# EAGLE board AugmentedStethoscope_v1 (EAGLE 8.6.3)
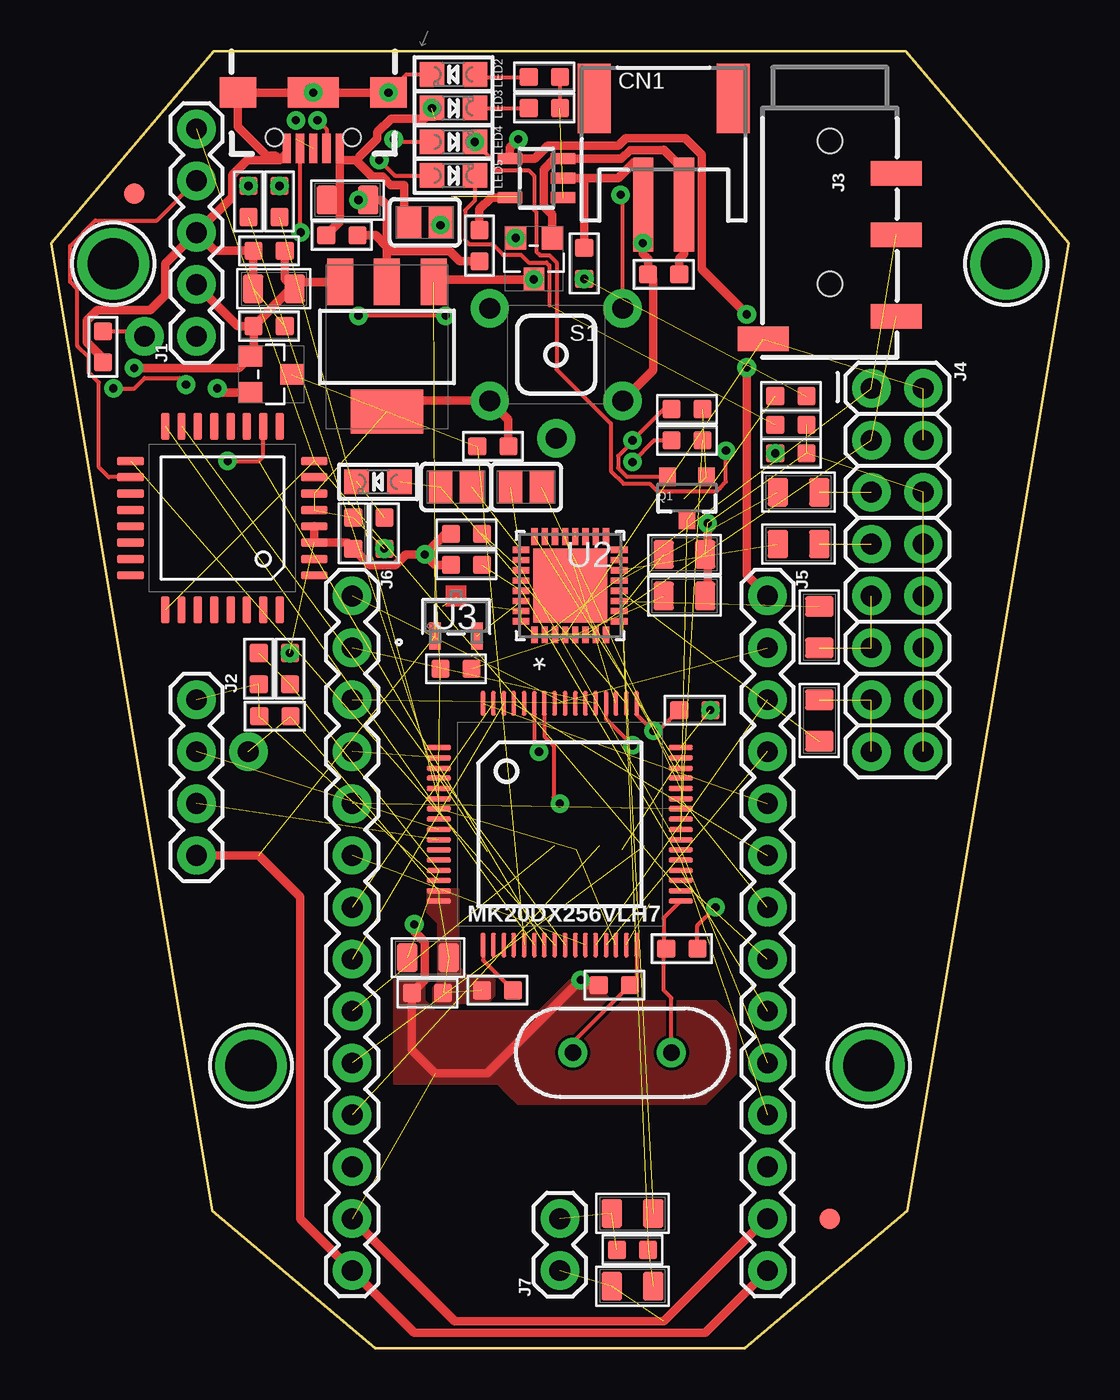
[diagram p0: board, top side]
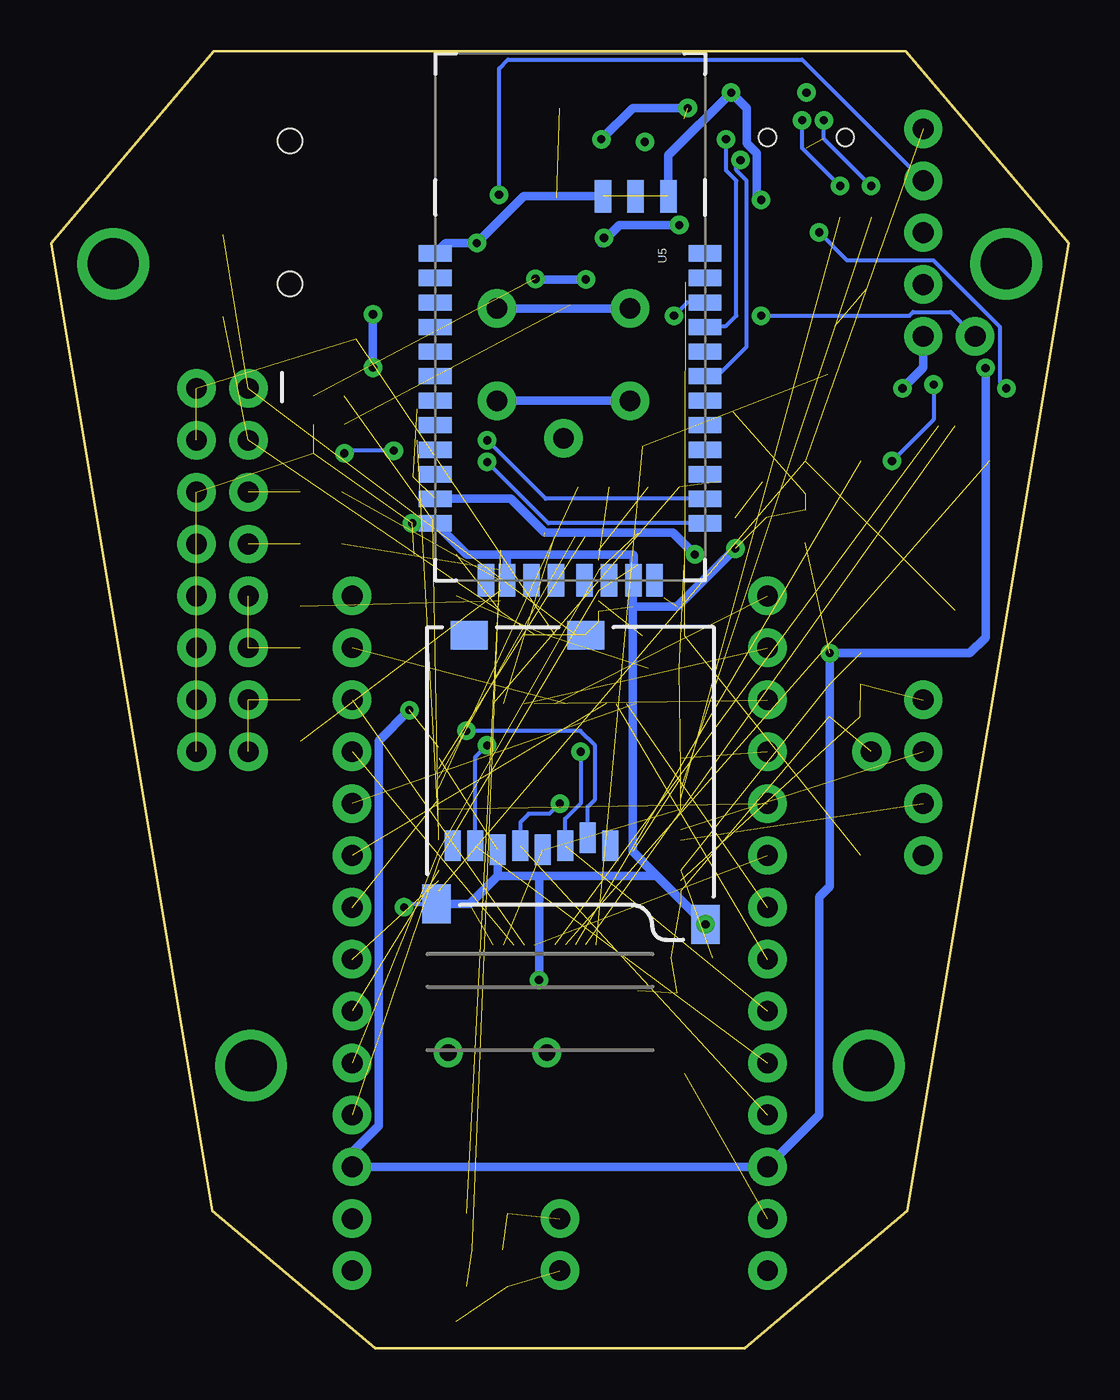
[diagram p1: board, bottom side, seen from below]

Size 49.78 x 63.5 mm. Coordinates in mm from the lower left corner, seen from the top.
Outline: 0,54.11 7.89,6.74 15.85,0 33.93,0 41.89,6.74 49.78,54.11 41.83,63.5 7.96,63.5 0,54.11
Copper layers (1*16): Top 0.035mm / dielectric 1.5mm / Bottom 0.035mm
Design rules "SparkFun *": minimum track width 8mil, minimum drill 20mil, track to track 6mil, track to pad 6mil, pad to pad 6mil, via to via 6mil, smd to smd 6mil, copper to edge 10mil, drill to drill 8mil, minimum pad ring 12mil, minimum via ring 10mil, stop-mask expansion 4mil, vias tented up to drill 25mil, thermal gap 10mil

## Footprints (pad centres in the part's own frame; a part is rotated, then mirrored left to right if it is on the bottom)
C0805 = smd 1.397 x 1.016: 1 0,1.016; 2 0,-1.016
C0603 = smd 0.889 x 0.889: 1 0,0.762; 2 0,-0.762
JSTPH2 = smd 1 x 4.6: 1 -1,-3.7; 2 1,-3.7 | smd 1.6 x 3.4: NC1 -3.4,1.5; NC2 3.4,1.5
FIDUCIAL_1MM = smd 1 x 1: 1 0,0
HC49US = drill 0.813: 1 -2.413,0; 2 2.413,0
1X05 = drill 1.016 pad 1.88: 1 0,0; 2 2.54,0; 3 5.08,0; 4 7.62,0; 5 10.16,0
1X04 = drill 1.016 pad 1.88: 1 0,0; 2 2.54,0; 3 5.08,0; 4 7.62,0
AUDIO_JACK_3.5MM_TRRS_SMD_RA = smd 1.2 x 2.5: EARTH 11.3,-3.25; RING1 6.2,3.25; RING2 3.2,3.25; TIP 10.2,3.25 | hole 1.2: 1.6,0; 8.6,0
2X8 = drill 1.016 pad 1.88: 1 0,0; 2 0,2.54; 3 2.54,0; 4 2.54,2.54; 5 5.08,0; 6 5.08,2.54; 7 7.62,0; 8 7.62,2.54; 9 10.16,0; 10 10.16,2.54; 11 12.7,0; 12 12.7,2.54; 13 15.24,0; 14 15.24,2.54; 15 17.78,0; 16 17.78,2.54
1X14 = drill 1.016 pad 1.88: 1 0,0; 2 2.54,0; 3 5.08,0; 4 7.62,0; 5 10.16,0; 6 12.7,0; 7 15.24,0; 8 17.78,0; 9 20.32,0; 10 22.86,0; 11 25.4,0; 12 27.94,0; 13 30.48,0; 14 33.02,0
1X02 = drill 1.016 pad 1.88: 1 0,0; 2 2.54,0
USB-B-MICRO-SMD = smd 1.45 x 0.4: D+ 2.725,0; D- 2.725,0.65; GND 2.725,-1.3; ID 2.725,-0.65; VBUS 2.725,1.3 | smd 1.5 x 1.8: SHIELD1 0,3.685; SHIELD2 0,-3.685 | smd 1.5 x 2.5: SHIELD3 0,0 | hole 0.85: 2.2,1.9; 2.2,-1.9
1X01NS = drill 1.016 pad 1.88: 1 0,0
LQFP32-08 = smd 1.3 x 0.4: 1 -4.493,2.8; 2 -4.493,2; 3 -4.493,1.2; 4 -4.493,0.4; 5 -4.493,-0.4; 6 -4.493,-1.2; 7 -4.493,-2; 8 -4.493,-2.8; 17 4.493,-2.8; 18 4.493,-2; 19 4.493,-1.2; 20 4.493,-0.4; 21 4.493,0.4; 22 4.493,1.2; 23 4.493,2; 24 4.493,2.8 | smd 0.4 x 1.3: 9 -2.8,-4.493; 10 -2,-4.493; 11 -1.2,-4.493; 12 -0.4,-4.493; 13 0.4,-4.493; 14 1.2,-4.493; 15 2,-4.493; 16 2.8,-4.493; 25 2.8,4.493; 26 2,4.493; 27 1.2,4.493; 28 0.4,4.493; 29 -0.4,4.493; 30 -1.2,4.493; 31 -2,4.493; 32 -2.8,4.493
LQFP64-05 = smd 1.2 x 0.25: 1 -5.915,3.759; 2 -5.915,3.251; 3 -5.915,2.743; 4 -5.915,2.261; 5 -5.915,1.753; 6 -5.915,1.245; 7 -5.915,0.762; 8 -5.915,0.254; 9 -5.915,-0.254; 10 -5.915,-0.762; 11 -5.915,-1.245; 12 -5.915,-1.753; 13 -5.915,-2.261; 14 -5.915,-2.743; 15 -5.915,-3.251; 16 -5.915,-3.759; 33 5.915,-3.759; 34 5.915,-3.251; 35 5.915,-2.743; 36 5.915,-2.261; 37 5.915,-1.753; 38 5.915,-1.245; 39 5.915,-0.762; 40 5.915,-0.254; 41 5.915,0.254; 42 5.915,0.762; 43 5.915,1.245; 44 5.915,1.753; 45 5.915,2.261; 46 5.915,2.743; 47 5.915,3.251; 48 5.915,3.759 | smd 0.25 x 1.2: 17 -3.759,-5.915; 18 -3.251,-5.915; 19 -2.743,-5.915; 20 -2.261,-5.915; 21 -1.753,-5.915; 22 -1.245,-5.915; 23 -0.762,-5.915; 24 -0.254,-5.915; 25 0.254,-5.915; 26 0.762,-5.915; 27 1.245,-5.915; 28 1.753,-5.915; 29 2.261,-5.915; 30 2.743,-5.915; 31 3.251,-5.915; 32 3.759,-5.915; 49 3.759,5.915; 50 3.251,5.915; 51 2.743,5.915; 52 2.261,5.915; 53 1.753,5.915; 54 1.245,5.915; 55 0.762,5.915; 56 0.254,5.915; 57 -0.254,5.915; 58 -0.762,5.915; 59 -1.245,5.915; 60 -1.753,5.915; 61 -2.261,5.915; 62 -2.743,5.915; 63 -3.251,5.915; 64 -3.759,5.915
CHIPLED_0805 = smd 1.2 x 1.2: A 0,-1.05; C 0,1.05
SOT23-3 = smd 0.8 x 0.9: 1 -0.95,-1; 2 0.95,-1; 3 0,1.1
R0603 = smd 0.889 x 0.889: 1 0,0.762; 2 0,-0.762
SOT-23 = smd 1.016 x 1.143: 1 -0.889,-1.016; 2 0.889,-1.016; 3 0,1.016
L0603 = smd 0.889 x 0.889: 1 -0.762,0; 2 0.762,0
ALPS_SKHH = drill 1.016 pad 1.88: 1 -3.251,2.261; 2 3.251,2.261; 3 -3.251,-2.261; 4 3.251,-2.261; 5 0,-4.1
SOLDERJUMPER = smd 1.168 x 1.6: 1 -0.762,0; 2 0.762,0
SOT-223 = smd 1.27 x 2.286: 1 -2.286,-3.175; 2 0,-3.175; 3 2.286,-3.175 | smd 3.556 x 2.159: PAD 0,3.175
MICRO-SD-SOCKET-PP = smd 0.8 x 1.5: 1 -8.94,10.7; 2 -7.84,10.3; 3 -6.74,10.7; 4 -5.64,10.9; 5 -4.54,10.7; 6 -3.44,10.9; 7 -2.34,10.7; 8 -1.24,10.7 | smd 1.8 x 1.4: CD1 -7.75,0.4; CD2 -2.05,0.4 | smd 1.4 x 1.9: GND1 -13.6,14.55; GND2 -0.45,13.55
QFN32 = smd 0.305 x 0.813: 1 1.75,2.4; 2 1.25,2.4; 3 0.75,2.4; 4 0.25,2.4; 5 -0.25,2.4; 6 -0.75,2.4; 7 -1.25,2.4; 8 -1.75,2.4; 17 -1.75,-2.4; 18 -1.25,-2.4; 19 -0.75,-2.4; 20 -0.25,-2.4; 21 0.25,-2.4; 22 0.75,-2.4; 23 1.25,-2.4; 24 1.75,-2.4 | smd 0.813 x 0.305: 9 -2.4,1.75; 10 -2.4,1.25; 11 -2.4,0.75; 12 -2.4,0.25; 13 -2.4,-0.25; 14 -2.4,-0.75; 15 -2.4,-1.25; 16 -2.4,-1.75; 25 2.4,-1.75; 26 2.4,-1.25; 27 2.4,-0.75; 28 2.4,-0.25; 29 2.4,0.25; 30 2.4,0.75; 31 2.4,1.25; 32 2.4,1.75 | smd 3.607 x 3.607: HTAB 0,0
SOT-23' = smd 0.561 x 1.321: 1 -1.025,-0.945; 2 1.025,-0.945 | smd 0 x 0 bottom: 3 0,0.945
SOT23-5 = smd 0.55 x 1.2: 1 -0.95,-1.3; 2 0,-1.3; 3 0.95,-1.3; 4 0.95,1.3; 5 -0.95,1.3
RN41 = smd 0.8 x 1.6: 1 -6.6,-6.6; 2 -5.4,-6.6; 3 -4.2,-6.6; 4 -3,-6.6; 5 -1.8,-6.6; 6 -0.6,-6.6; 7 0.6,-6.6; 8 1.8,-6.6; 9 3,-6.6; 10 4.2,-6.6; 11 5.4,-6.6; 12 6.6,-6.6; 13 6.6,6.6; 14 5.4,6.6; 15 4.2,6.6; 16 3,6.6; 17 1.8,6.6; 18 0.6,6.6; 19 -0.6,6.6; 20 -1.8,6.6; 21 -3,6.6; 22 -4.2,6.6; 23 -5.4,6.6; 24 -6.6,6.6 | smd 1.6 x 0.8: 25 -9.4,4.8; 26 -9.4,3.2; 27 -9.4,1.6; 28 9.4,3.1; 29 9.4,-3.1; 30 9.4,-4.122; 31 9.4,-1.9; 32 9.4,-0.7; 33 9.4,0.7; 34 9.4,1.9; 35 9.4,4.122
MOUNTINGHOLE_2.5_PLATED = drill 2.5 pad 3.2: P$1 0,0

## Placement (x,y rotation side)
C1  2.2uF  [C0805]  14.5,56.21 90 top
C2  0.1uF  [C0603]  14.78,39.9 180 top
C3  0.1uF  [C0603]  21.62,44.15 90 top
C4  0.1uF  [C0603]  26.09,53.11 180 top
C5  2.2uF  [C0805]  18.44,19.13 90 top
C6  2.2uF  [C0805]  37.59,35.31 0 top
C7  2.2uF  [C0805]  37.59,30.73 180 top
C8  22pF  [C0603]  27.56,17.78 270 top
C9  2.2uF  [C0805]  36.58,41.91 90 top
C10  2.2uF  [C0805]  36.58,39.37 90 top
C11  22pF  [C0603]  30.86,19.56 90 top
C12  0.1uF  [C0603]  10.67,53.72 270 top
C13  0.1uF  [C0603]  10.95,30.94 90 top
C14  0.15uF  [C0805]  30.99,38.86 90 top
C15  2.2uF  [C0805]  10.9,51.87 270 top
C16  0.1uF  [C0603]  10.67,50.04 90 top
C17  0.1uF  [C0603]  21.84,17.53 270 top
C18  0.1uF  [C0805]  28.45,6.6 270 top
C19  2.2uF  [C0805]  30.99,36.83 90 top
C20  2.2uF  [C0805]  28.45,3.05 270 top
C21  10uF  [C0603]  14.22,54.48 90 top
C22  10uF  [C0603]  29.97,52.58 270 top
CN1  JSTPH  [JSTPH2]  29.97,59.69 0 top
FID2  FIDUCIAL""  [FIDUCIAL_1MM]  4.06,56.52 0 top
FID3  FIDUCIAL""  [FIDUCIAL_1MM]  38.1,6.35 0 top
G1  16MHz  [HC49US]  27.94,14.48 0 top
J1  [1X05]  7.11,49.53 90 top
J2  [1X04]  7.11,31.75 270 top
J3  AUDIO_JACK_TRRSSMD_RA  [AUDIO_JACK_3.5MM_TRRS_SMD_RA]  38.1,60.71 270 top
J4  [2X8]  40.13,46.99 270 top
J5  [1X14]  35.05,36.83 270 top
J6  [1X14]  14.73,36.83 270 top
J7  [1X02]  24.89,3.81 90 top
J8  [USB-B-MICRO-SMD]  12.83,61.47 270 top
JP1  M01SMDNS  [1X01NS]  4.57,49.53 90 top
JP2  M01SMDNS  [1X01NS]  9.65,29.21 270 top
K1  MKL04Z32VLC4  [LQFP32-08]  8.38,40.64 180 top
K2  MK20DX256VLH7  [LQFP64-05]  24.89,25.65 0 top
LED1  BLUE  [CHIPLED_0805]  16,42.42 90 top
LED2  GREEN  [CHIPLED_0805]  19.69,62.36 90 top
LED3  RED  [CHIPLED_0805]  19.69,60.71 270 top
LED4  RED  [CHIPLED_0805]  19.69,59.05 270 top
LED5  GREEN  [CHIPLED_0805]  19.69,57.4 270 top
Q1  MOSFET-NCHANNELSMD  [SOT23-3]  31.12,41.66 180 top
R1  10K  [R0603]  31.5,31.24 90 top
R2  [SOT-23]  10.77,47.68 270 top
R3  [L0603]  18.42,17.4 0 top
R4  [L0603]  11.68,33.27 90 top
R5  470  [R0603]  10.16,33.27 0 top
R6  33  [R0603]  11.18,56.13 0 top
R7  33  [R0603]  9.65,56.13 0 top
R8  [L0603]  19.81,33.27 180 top
R9  2.2K  [R0603]  28.45,4.83 90 top
R10  470  [R0603]  16.31,39.9 180 top
R11  10K  [R0603]  20.32,38.35 270 top
R12  10K  [R0603]  20.32,39.88 270 top
R13  10K  [R0603]  36.2,46.61 270 top
R14  470  [R0603]  24.13,60.71 90 top
R15  470  [R0603]  24.13,62.23 90 top
R16  10K  [R0603]  31.12,44.45 270 top
R17  10K  [R0603]  31.12,45.97 270 top
R18  330  [R0603]  36.2,43.81 270 top
R19  2K  [R0603]  20.96,53.98 180 top
R20  10K  [R0603]  2.54,49.02 180 top
R21  [SOT-23]  23.62,53.34 180 top
R22  330  [R0603]  36.2,45.21 270 top
S1  [ALPS_SKHH]  24.71,48.64 0 top
SJ1  [SOLDERJUMPER]  23.24,42.16 0 top
SJ2  [SOLDERJUMPER]  19.81,42.16 180 top
SJ3  [SOLDERJUMPER]  18.29,55.12 0 top
T1  MCP1825S  [SOT-223]  16.43,49.02 180 top
U1  microSD  [MICRO-SD-SOCKET-PP]  31.37,35.31 180 bottom
U2  SGTL5000XNAA3R2  [QFN32]  25.4,37.34 180 top
U3  AP7313-18SAG-7  [SOT-23']  19.81,35.81 0 top
U4  MCP73831T-2ACI/OT  [SOT23-5]  23.75,57.28 90 top
U5  BLUETOOTH-RN41  [RN41]  24.38,46.99 270 bottom
U$1  MOUNTINGHOLE2.5  [MOUNTINGHOLE_2.5_PLATED]  46.74,53.09 0 top
U$15  MOUNTINGHOLE2.5  [MOUNTINGHOLE_2.5_PLATED]  3.05,53.09 180 top
U$17  MOUNTINGHOLE2.5  [MOUNTINGHOLE_2.5_PLATED]  40.01,13.84 0 top
U$18  MOUNTINGHOLE2.5  [MOUNTINGHOLE_2.5_PLATED]  9.78,13.84 0 top

## Library data of the parts
C1 C5-C7 C9 C10 C14 C15 C18-C20 = t32_ref; DESC: 2.2uF / 25 VDC / X7R; MF: Taiyo Yuden; MPN: TMK212B7225KG-TR; OC_MOUSER: 963-TMK212B7225KG-TR; PACKAGE: 0805; TYPE: Capacitor
C2-C4 C12 C13 C16 C17 C21 C22 = t32_ref; DESC: 0.1uF / 16VDC / X7R; MF: Murata Electronics; MPN: GRM188R71C104KA01D; OC_MOUSER: 81-GRM39X104K16; PACKAGE: 0603; TYPE: Capacitor
C8 C11 = t32_ref; DESC: 22pF / 50VDC / C0G (NP0); MF: Vishay / Vitramon; MPN: VJ0603A220JXACW1BC; OC_MOUSER: 77-VJ0603A220JXACBC; PACKAGE: 0603; TYPE: Capacitor
CN1 LED1-LED5 U4 = microbuilder
FID2 FID3 U$1 U$15 U$17 U$18 = microbuilder; BOM: EXCLUDE
G1 = t32_ref; DESC: 16MHz / 18pF / 10ppm; MF: ABRACON; MPN: ABL-16.000MHz-B1U; OC_MOUSER: 815-ABL-16-B1U; PACKAGE: HC-49US; TYPE: Crystal
J1 J4-J7 = SparkFun-Connectors
J2 = SparkFun-Connectors; PROD_ID: CONN-09696
J3 = SparkFun-Connectors; PROD_ID: CONN-10676; SF_ID: PRT-12639
J8 = SparkFun-Connectors; PROD_ID: CONN-11752
JP1 JP2 Q1 U1 = SparkFun
K1 = t32_ref; DESC: MKL04Z32VLC4 (preprogrammed); MF: PJRC; MPN: IC_MKL04Z32_TQFP32; PACKAGE: LQFP-32; TYPE: Microcontroller
K2 = t32_ref; DESC: MK20DX256VLH7; MF: NXP; MPN: MK20DX256VLH7; OC_MOUSER: 841-MK20DX256VLH7; PACKAGE: LQFP-64; TYPE: Microcontroller
R1 R5 R9-R13 R17-R20 R22 = t32_ref; DESC: 470R / 1 % / 0.1 W; MF: Vishay; MPN: CRCW0603470RFKEA; OC_MOUSER: 71-CRCW0603-470-E3; PACKAGE: 0603; TYPE: Resistor
R2 R21 = t32_ref; DESC: Dual Schottky, common cat; MF: NXP Semiconductors; MPN: BAT54C,215; OC_MOUSER: 771-BAT54C-T/R; PACKAGE: SOT-23; TYPE: Diode
R3 R4 R8 = t32_ref; DESC: 600R / 100MHz; MF: Murata Electronics; MPN: BLM18AG601SN1D; OC_MOUSER: 81-BLM11A601S; PACKAGE: 0603; TYPE: Ferrite
R6 R7 R14-R16 = t32_ref; DESC: 33R / 1% / 0.25 W; MF: Panasonic; MPN: ERJ-PA3F33R0V; OC_MOUSER: 667-ERJ-PA3F33R0V; PACKAGE: 0603; TYPE: Resistor
S1 = t32_ref; DESC: SPST; MF: ALPS; MPN: SKHHPKA010; OC_MOUSER: 688-SKHHPK; PACKAGE: 6x6x5 MM; TYPE: Tactile switch
SJ1-SJ3 = t32_ref
T1 = t32_ref; DESC: 3.3V 500mA; MF: Microchip Technology; MPN: MCP1825S-3302E/DB; OC_MOUSER: 579-MCP1825S-3302EDB; PACKAGE: SOT-223-3; TYPE: Voltage regulator
U2 = pd3d_augmentedstethoscope; MANUFACTURER_PART_NUMBER: SGTL5000XNAA3R2; VENDOR: Freescale
U3 = pd3d_augmentedstethoscope; MANUFACTURER_PART_NUMBER: AP731318SAG7; VENDOR: Diodes Inc
U5 = ScratchPad

## Nets
0/RX1: K2.39 Q1.3 R13.2
1/TX1: K2.40 R16.1
2: J5.2 K2.57
3.3V: C2.1 C12.1 C15.1 C16.1 J1.2 J5.12 J6.12 K1.3 K1.4 K2.3 K2.7 K2.30 K2.48 Q1.1 R1.2 R2.1 R4.2 R8.2 R11.2 R12.2 R17.1 T1.3 U1.4 U2.20 U5.11
3/PWM: J5.3 K2.28
4/PWM: J5.4 K2.29
5/PWM: J5.5 K2.64
6/PWM: J5.6 K2.61
7/SPI_MOSI: J6.9 K2.59 U1.3
8: K2.60
9: K2.46 U2.24
10/SPI_CS: K2.49 R1.1 U1.2
11: K2.51 U2.21
12/SPI_MISO: J6.10 K2.52 U1.7
13/LED: K2.50 LED1.A SJ2.2
14/SPI_SCK: J6.11 K2.58 U1.5
15/A1: J5.7 K2.43
16/A2: J5.8 K2.35
17/A3: J5.9 K2.36
18/A4/SDA: J5.10 K2.38 R12.1 U2.27
19/A5/SCL: J5.11 K2.37 R11.1 U2.29
20/A6/SPI_CS: J6.8 K2.62
21/A7/SPI_CS: J6.7 K2.63
22/A8: K2.44 SJ1.2
23/A9: K2.45 U2.23
24: J6.6 K2.27
25/PWM: J6.5 K2.42
26/A15: J6.4 K2.2
27/A16: J6.3 K2.54
28/A17: J6.2 K2.53
29/A18: K2.55
30/A19: J6.1 K2.56
31/A20: K2.1
32/TOUCH: K2.41
33/TOUCH: K2.26
A10: J2.2 K2.9
A11: J2.3 K2.10
A12: K2.11
A13: K2.12
AGND: C5.2 C13.2 C17.2 JP2.1 K2.15 K2.16 R3.2
AREF: C13.1 J2.1 K2.14 R5.2
D3: LED4.C R18.2
D4: LED5.C R22.2
D+: J8.D+ R7.1
D-: J8.D- R6.1
DAC/A14: K2.18
DETECT: U1.CD2
GND: C1.2 C2.2 C3.2 C4.2 C8.2 C11.2 C12.2 C14.2 C15.2 C16.2 C19.2 C20.2 C21.2 C22.2 CN1.1 J1.3 J4.6 J4.8 J4.10 J4.12 J4.14 J4.16 J5.13 J6.13 J7.1 J8.GND J8.SHIELD1 J8.SHIELD2 J8.SHIELD3 K1.5 K1.6 K2.4 K2.31 K2.47 LED2.C R3.1 R10.1 R18.1 R19.1 R20.1 R22.1 S1.3 S1.4 T1.2 T1.PAD U1.6 U1.GND1 U1.GND2 U2.1 U2.3 U2.7 U2.31 U2.32 U3.3 U4.2 U5.1 U5.12 U5.25 U5.27 U5.28 U5.29
HPGND: J3.EARTH J4.2 J4.4 U2.4
HPL: J3.TIP J4.3 U2.6
HPR: J3.RING1 J4.1 U2.2
ID: J8.ID K1.10 K2.23
LIL: C10.2 J4.7
LIL_ISO: C10.1 U2.14
LIR: C9.2 J4.5
LIR_ISO: C9.1 U2.13
LOL: C7.2 J4.13 J4.15
LOL_ISO: C7.1 U2.12
LOR: C6.2 J4.9 J4.11
LOR_ISO: C6.1 U2.11
MIC: C18.2 J7.2 R9.1
MIC_BIAS: C20.1 R9.2 U2.16
N$1: C22.1 CN1.2 R21.1 U4.3
N$2: K1.16 K2.22
N$3: K1.17 K2.24
N$4: C14.1 U2.10
N$5: C8.1 G1.1 K2.32
N$6: C11.1 G1.2 K2.33
N$9: SJ1.1 U2.26
N$10: K2.5 R7.2
N$11: C17.1 K2.17
N$12: U2.30 U3.2
N$13: SJ2.1 U2.25
N$14: K2.6 R6.2
N$15: C5.1 K2.13 R4.1 R5.1
N$18: R21.2 SJ3.2
N$52: LED1.C R10.2
N$68: C3.1 K2.21 R2.3
N$70: K1.15 K2.25
N$71: LED3.C R14.1
N$72: R14.2 R15.2 U4.1
N$73: LED4.A U5.21
N$74: LED5.A U5.19
N$75: R19.2 U4.5
N$76: LED2.A R15.1
N$79: C19.1 R8.1 U2.5
N$80: C18.1 U2.15
PIO4: JP1.1 R20.2 U5.22
PROG: J1.4 K1.18 S1.1 S1.2
RESET: J1.5 K1.8 K1.25 K2.34
SMIRF_CTS: U5.16
SMIRF_RTS: U5.15
SMIRF_RX: R16.2 U5.13
SMIRF_TX: Q1.2 R17.2 U5.14
V_USB: C1.1 C21.1 J5.1 J8.VBUS LED3.A SJ3.1 U4.4
VIN: C4.1 J2.4 J5.14 J6.14 R13.1 R21.3 T1.1 U3.1
VRTC: J1.1 R2.2

## Tracks (layer width: path | path; a pad name or v marks a point on that pad's centre or on a via)
0/RX1  (2 unrouted)
1/TX1  (1 unrouted)
2  (1 unrouted)
3.3V  (via drill 0.4)  (10 unrouted)
  Top 0.406: J1.2 9.14,50.04 C16.1 | C15.1 12.24,52.2 T1.3 | C15.1 11.43,52.35 C12.1 | C16.1 9.91,48.72 R2.1 9.17,47.98 v4.06,47.98 | C16.1 11.74,51.87 C15.1 | v18.29,38.86 19.3,39.88 R12.2 | v18.29,38.86 18.8,38.35 R11.2 | K1.4 K1.3 14.48,39.44 C2.1 15.58,38.34 16.83,38.34 17.35,38.86 v18.29,38.86
  Bottom 0.406: v4.06,47.98 4.06,34.8 4.83,34.04 R4.2 11.68,22.61 12.19,22.1 12.19,11.43 J6.12 J5.12 35.05,9.6 33.76,10.89 33.76,29.74 R1.2 | U5.11 27.3,41.59 25.64,39.93 19.36,39.93 v18.29,38.86
  other vias: 11.68,34.04 32.26,31.24
3/PWM  (1 unrouted)
4/PWM  (1 unrouted)
5/PWM  (1 unrouted)
6/PWM  (1 unrouted)
7/SPI_MOSI  (via drill 0.4)  (1 unrouted)
  Top 0.203: K2.59 23.65,29.44 v23.88,29.21
  Bottom 0.203: U1.3 24.63,25.92 23.88,26.67 v23.88,29.21
9  (1 unrouted)
10/SPI_CS  (via drill 0.4)
  Top 0.203: R1.1 29.72,30.23 v29.46,30.23 28.65,31.04 K2.49
  Bottom 0.203: U1.2 23.53,26.51 23.17,26.88 23.17,29.5 23.89,30.23 v29.46,30.23
11  (1 unrouted)
12/SPI_MISO  (via drill 0.4)  (1 unrouted)
  Top 0.203: v28.45,29.52 27.15,30.81 K2.52
  Bottom 0.203: U1.7 29.03,28.94 v28.45,29.52
13/LED  (2 unrouted)
14/SPI_SCK  (via drill 0.4)  (1 unrouted)
  Top 0.203: K2.58 24.13,29.96 24.58,29.5 24.58,26.98 v24.89,26.67
  Bottom 0.203: v24.89,26.67 25.4,26.16 26.42,26.16 26.83,25.75 U1.5
15/A1  (1 unrouted)
16/A2  (1 unrouted)
17/A3  (1 unrouted)
18/A4/SDA  (3 unrouted)
19/A5/SCL  (3 unrouted)
20/A6/SPI_CS  (1 unrouted)
21/A7/SPI_CS  (1 unrouted)
22/A8  (1 unrouted)
23/A9  (1 unrouted)
24  (1 unrouted)
25/PWM  (1 unrouted)
26/A15  (1 unrouted)
27/A16  (1 unrouted)
28/A17  (1 unrouted)
30/A19  (1 unrouted)
A10  (1 unrouted)
A11  (1 unrouted)
AGND  (6 unrouted)
  pour Top (no thermals): 18.42,22.48 18.42,21.34 18.92,20.83 18.92,17.91 18.67,17.65 18.67,17.02 18.8,16.89 21.34,16.89 21.72,17.27 21.72,18.03 21.59,18.16 21.46,18.29 20.32,18.29 19.94,18.67 19.94,22.48
AREF  (3 unrouted)
D3  (via drill 0.4)
  Top 0.203: LED4.C 21.6,58.2 21.6,57.85 21.78,57.66 23.37,57.66 23.64,57.39 23.64,55.72 23.75,55.6 23.75,53.68 23.92,53.5 24.38,53.5 24.74,53.15 24.74,47.92 27.38,45.27 27.38,42.95 28.01,42.33 29.29,42.33 29.66,41.95 32.57,41.95 32.72,42.1 32.72,42.12 33.02,42.42 v33.02,43.94
  Bottom 0.203: v33.02,43.94 35.31,43.94 R18.2
  other vias: 20.74,59.05 35.43,43.81
D4  (1 unrouted)
  Top 0.203: LED5.C 20.74,56.18 20.26,55.7 20.26,54.25 20.47,54.04 21.61,54.04 22.12,53.53 22.99,53.53 23.37,53.15 24.24,53.15 24.38,53 24.38,51.05
D+  (via drill 0.4)  (1 unrouted)
  Top 0.203: R7.1 v9.66,56.9
  Bottom 0.203: v9.66,56.9 11.98,59.21 v11.98,60.11
D-  (via drill 0.4)
  Top 0.203: v13.04,60.11 13.48,59.67 J8.D-
  Bottom 0.203: R6.1 13.04,58.75 v13.04,60.11
  other vias: 11.18,56.9
GND  (via drill 0.4)  (28 unrouted)
  Top 0.203: C11.2 31.62,20.7 v32.51,21.59 | J8.SHIELD1 17.4,62.36 LED2.C
  Top 0.406: U4.2 25.91,57.28 | 25.91,57.28 27.75,57.28 28.56,58.09 28.96,58.09 28.96,56.01 CN1.1 28.96,55.97 v28.96,54.1 28.96,53.59 29.21,53.34 C22.2 29.46,52.32 29.46,47.88 S1.4 | C4.2 26.09,57.1 25.91,57.28 | J1.3 8,53.72 C12.2 9.88,53.7 C15.2 | J6.13 19.76,1.32 29.97,1.32 35,6.35 J5.13 | U1.GND1 17.77,20.42 18.29,19.9 18.29,18.03 R3.1 17.65,14.61 18.8,13.46 21.34,13.46 v25.91,18.03 26.16,17.78 C8.2 | v32.12,40.39 32.12,36.95 C19.2 | R10.1 v16.31,39.15 | R20.1 2.54,48.46 1.74,49.26 1.74,50.31 2.26,50.83 4.85,50.83 5.59,51.56 5.59,53.09 J1.3 | 16.43,53.92 15.88,54.48 C21.2 | T1.2 16.43,53.92 | 16.43,53.92 16.43,55.96 16.18,56.21 C1.2 v15.04,56.21 | J8.SHIELD1 J8.SHIELD3 J8.SHIELD2 9.14,59.8 10.56,58.39 10.96,58.39 11.18,58.17 | 11.18,58.17 11.53,58.52 J8.GND | J1.3 8.85,56.35 8.85,57.42 9.6,58.17 11.18,58.17 | R19.1 19.99,53.21 19.5,53.7 16.66,53.7 16.43,53.92 | C3.2 22.38,45.47 S1.3 16.97,46.38 T1.PAD
  Bottom 0.203: v32.51,21.59 32.35,21.76 U1.GND2
  Bottom 0.406: U5.1 30.47,54.1 v28.96,54.1 26.67,56.39 U5.27 | 27.93,23.12 U1.6 | U1.GND1 20.22,23.21 | 20.22,23.21 21.34,24.32 21.34,36.32 | 21.34,36.32 21.34,37.54 U5.28 21.28,38.81 21.34,38.86 27.43,38.86 | 27.43,38.86 27.48,38.81 U5.29 | 27.43,38.86 29.46,38.86 U5.12 v32.12,40.39 | v16.31,39.15 19.14,36.32 21.34,36.32 | U5.25 19.58,58.39 J8.SHIELD1 15.75,60.71 15.75,59 15.25,58.5 15.25,56.42 v15.04,56.21 | 27.93,23.12 25.91,23.12 | 25.91,23.12 20.31,23.12 20.22,23.21 | U1.GND2 29.3,21.76 27.93,23.12 | 25.91,23.12 v25.91,18.03 | S1.3 S1.4
  other vias: 17.77,20.76 12.83,61.47 16.51,61.47
  pour Top (no thermals): 17.78,17.53 18.8,16.51 19.3,16.51 32.51,16.51 32.51,12.95 16.76,12.95 16.76,17.53
  pour Top (no thermals): 21.84,12.95 22.35,12.45 22.86,11.94 32,11.94 33.53,13.46 33.53,16 32.51,17.02 27.43,17.02 26.42,18.03 25.4,18.03 23.88,16.51 18.8,16.51 17.78,17.53 16.76,17.53 16.76,12.95
  pour Top (no thermals): 16.76,17.53 16.76,18.03 18.29,18.03 18.29,16.51 16.76,16.51
HPGND  (3 unrouted)
HPL  (2 unrouted)
HPR  (2 unrouted)
ID  (via drill 0.4)  (1 unrouted)
  Top 0.203: J8.ID 12.18,54.66 v12.21,54.62 | v3.05,46.99 4.07,46.99 4.58,47.49 6.28,47.49 v6.6,47.17 | K1.10 10.38,43.66 10.16,43.43 v8.64,43.43
  Bottom 0.203: v12.21,54.62 10.85,53.26 6.62,53.26 3.36,50 3.36,47.3 v3.05,46.99 | v6.6,47.17 6.6,45.47 v8.64,43.43
LIL  (1 unrouted)
LIL_ISO  (1 unrouted)
LIR  (1 unrouted)
LIR_ISO  (1 unrouted)
LOL  (2 unrouted)
LOL_ISO  (1 unrouted)
LOR  (2 unrouted)
LOR_ISO  (1 unrouted)
MIC  (2 unrouted)
MIC_BIAS  (2 unrouted)
N$1
  Top 0.406: R21.1 24.51,55.49 24.09,55.91 24.09,57.7 24.62,58.23 U4.3 27.91,58.23 28.33,58.65 29.94,58.65 29.97,58.67 30.97,57.67 CN1.2 30.97,53.61 30.99,53.59 30.73,53.34 C22.1
N$2  (1 unrouted)
N$3  (1 unrouted)
N$4  (1 unrouted)
N$5
  Top 0.203: K2.32 28.65,18.11 C8.1 25.53,14.99 G1.1
N$6
  Top 0.203: G1.2 30.35,17.14 29.97,17.53 29.97,19.43 | 29.97,19.43 C11.1 | K2.33 29.97,21.06 29.97,19.43
N$9  (1 unrouted)
N$10  (1 unrouted)
N$11
  Top 0.203: K2.17 21.13,19 C17.1
N$12  (1 unrouted)
N$13  (1 unrouted)
N$14  (1 unrouted)
N$15  (3 unrouted)
N$18  (via drill 0.4)
  Top 0.406: SJ3.2 v19.05,54.98
  Bottom 0.406: v19.05,54.98 21.98,54.98 22.73,54.23 | 22.86,54.1 22.73,54.23 | 22.73,54.23 R21.2
  other vias: 22.73,54.36
N$52  (1 unrouted)
N$68  (2 unrouted)
N$70  (1 unrouted)
N$71
  Top 0.203: LED3.C R14.1
N$72  (1 unrouted)
  Top 0.203: R15.2 R14.2
N$73  (via drill 0.4)
  Top 0.203: v16.76,59.18 16.89,59.05 LED4.A
  Bottom 0.203: v16.76,59.18 16.76,57.66 16.26,57.15 16.26,50.55 16.76,50.04 17.74,50.04 U5.21
N$74  (via drill 0.4)
  Top 0.203: v16.06,58.17 16.82,57.4 LED5.A
  Bottom 0.203: U5.19 17.18,47.59 15.75,49.02 15.75,57.15 16.26,57.66 16.26,57.97 v16.06,58.17
N$75
  Top 0.406: R19.2 20.96,55.75 21.53,56.33 U4.5
N$76
  Top 0.203: LED2.A 20.86,62.23 R15.1
N$79  (2 unrouted)
N$80  (1 unrouted)
PIO4  (via drill 0.4)
  Top 0.203: v19.3,50.55 v15.04,50.55 | R20.2 4.32,49.78 JP1.1
  Bottom 0.203: U5.22 18.66,51.19 v19.3,50.55 | v15.04,50.55 7.78,50.55 7.61,50.72 5.77,50.72 JP1.1
PROG  (via drill 0.4)
  Top 0.203: K1.18 2.83,42.64 2.34,43.13 2.34,47.28 1.84,47.77 1.84,48.51 1.28,49.07 1.28,51.86 0.93,52.21 0.93,53.96 2.17,55.2 5.17,55.2 J1.4 | S1.2 27.97,56.37 v27.87,56.47
  Bottom 0.203: v27.87,56.47 27.87,62.65 27.43,63.08 13.04,63.08 J1.4
  Bottom 0.406: S1.1 S1.2
RESET  (3 unrouted)
SMIRF_RX  (via drill 0.4)
  Top 0.203: v28.45,43.39 29.51,44.45 R16.2
  Bottom 0.203: U5.13 25.45,40.39 v28.45,43.39
SMIRF_TX  (via drill 0.4)
  Top 0.203: R17.2 29.97,45.97 v28.45,44.45 28.45,44.39 27.74,43.68 27.74,43.1 28.16,42.68 30.14,42.68 Q1.2
  Bottom 0.203: U5.14 25.59,41.59 v28.45,44.45
V_USB  (via drill 0.4)  (1 unrouted)
  Top 0.203: 14.91,58.17 15.08,58.33 | 18.29,60.2 18.8,60.2
  Top 0.406: J8.VBUS 14.13,58.17 | 14.13,58.17 14.13,56.85 | 14.13,56.85 C1.1 | C21.1 14.13,55.15 14.13,56.85 | SJ3.1 17.27,55.37 17.27,56.95 16.63,56.95 16.22,57.36 15.72,57.36 14.91,58.17 14.13,58.17 | v22.86,59.18 22.45,58.77 U4.4 23.67,58.23 24.3,58.86 27.75,58.86 28.12,59.23 31.03,59.23 31.83,58.44 31.83,52.82 v34.04,50.61 | J5.1 34.04,37.85 v34.04,48.01 | 15.08,58.33 15.95,59.21 15.95,59.52 16.64,60.2 18.29,60.2
  Bottom 0.406: v22.86,59.18 21.34,60.71 LED3.A | v34.04,48.01 v34.04,50.61
  other vias: 18.64,60.71
VIN  (via drill 0.4)  (3 unrouted)
  Top 0.406: J5.14 32,0.76 17.78,0.76 J6.14 12.19,6.35 12.19,22.1 10.16,24.13 J2.4 | T1.1 18.85,52.32 R21.3 23.65,52.35
  Bottom 0.406: R21.3 26.06,52.32 C4.1
  other vias: 23.62,52.32 26.09,52.35
VRTC  (via drill 0.4)
  Top 0.406: v8.13,46.99 8.33,46.79 R2.2
  Bottom 0.406: J1.1 7.11,48.01 v8.13,46.99
(copper drawn outside any net)
  shapes: Top area x1